# Altium PCB board.PcbDoc (part 1 of 3)
Units mil, origin at the board's own origin, x right, y up, seen from the top; angles counter-clockwise.
Board outline 6000 x 4000 mil, 2 copper layers (Top Layer, Bottom Layer); 112 components, 157 nets, 575 pads, 180 vias.
Unrouted connection lines stored in the file: 1.
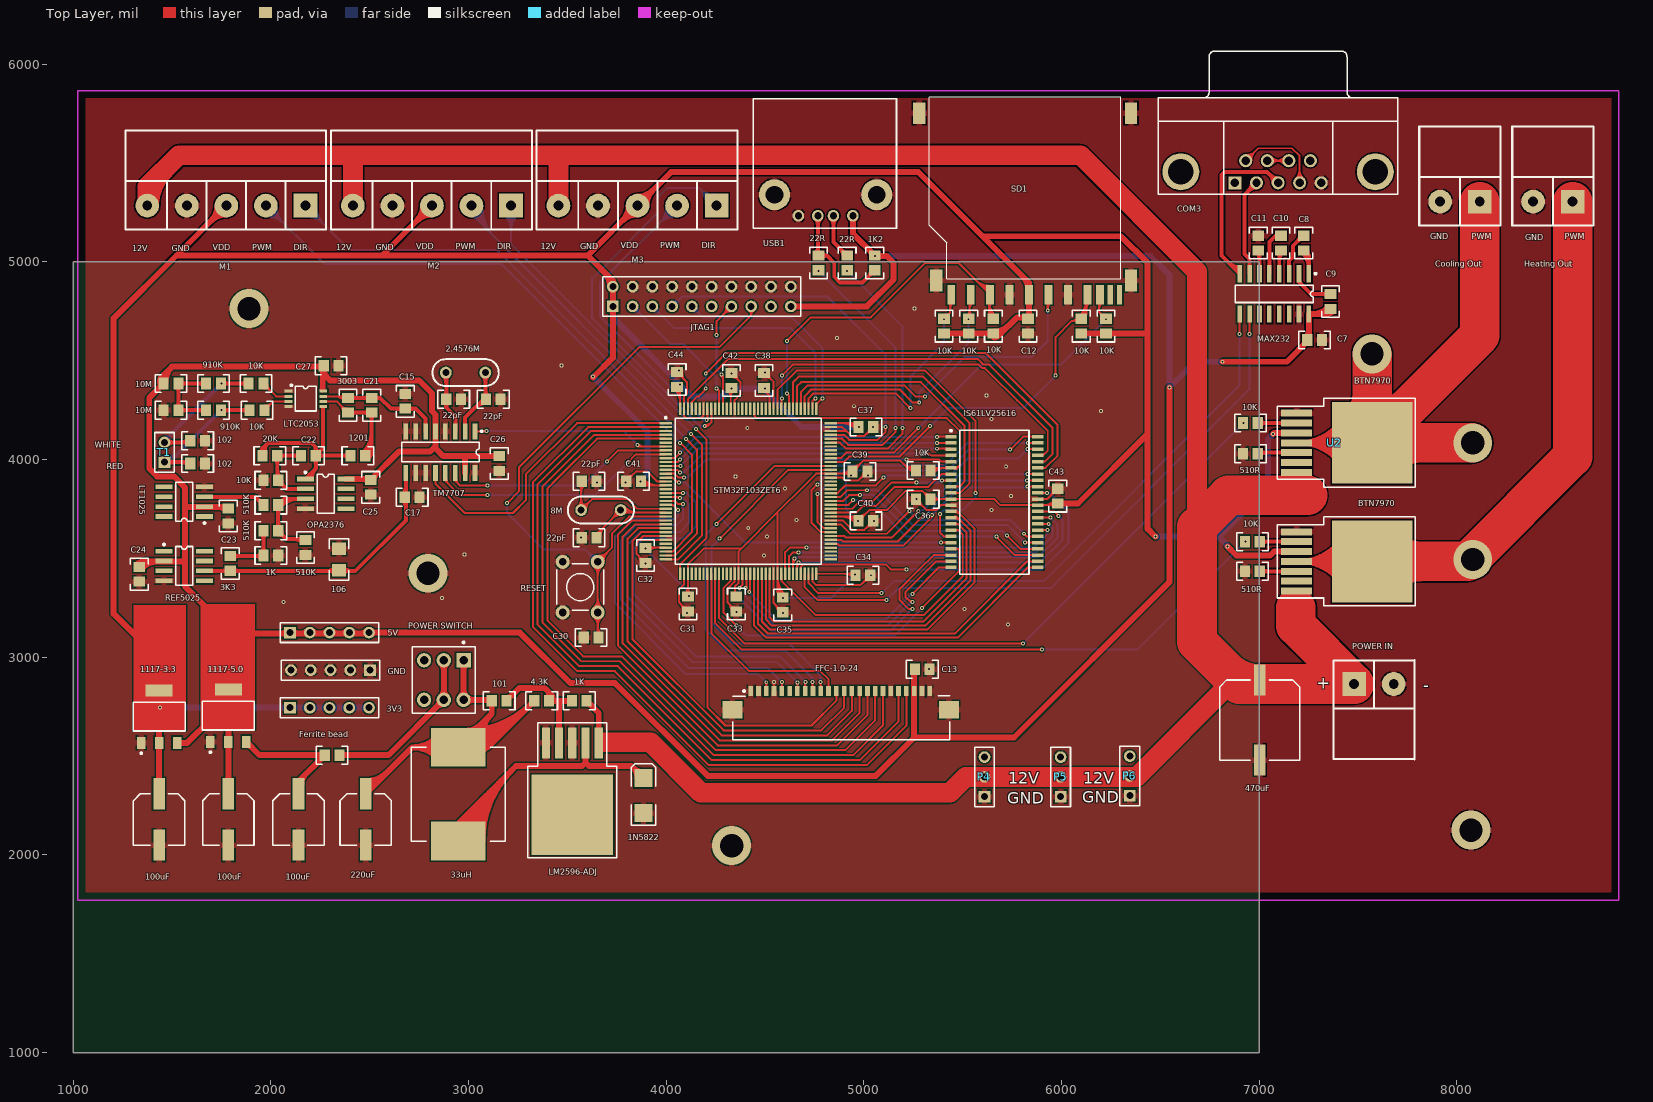
[diagram p0: Top Layer view]
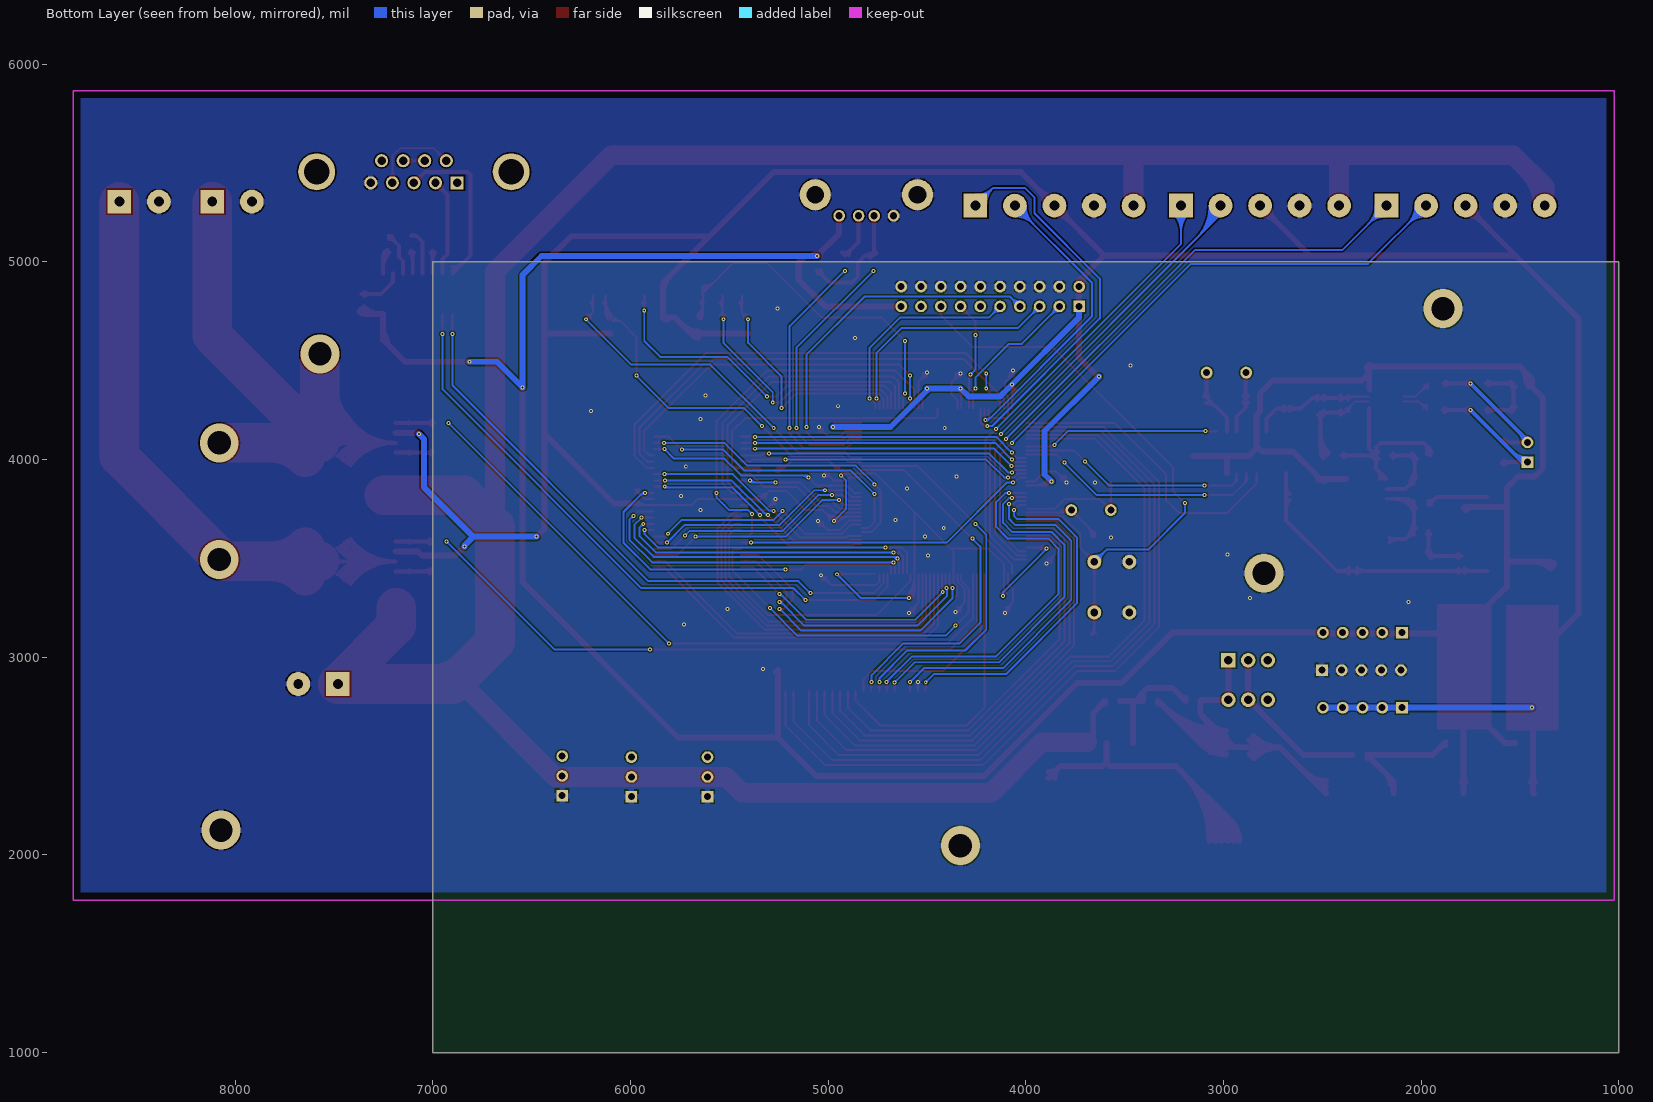
[diagram p1: Bottom Layer view, seen from below]

## Layer stack, top to bottom
Top Layer: signal copper 1.4
Dielectric: dielectric 12.6, FR-4, Dk 4.8
Bottom Layer: signal copper 1.4

## Board outline
1000,1000 7000,1000 7000,5000 1000,5000

## Design rules (kind name [scope] priority, off if disabled: settings)
Clearance [All] p1: gap=7
HoleSize [All] p1: absolutevalues=TRUE maxlimit=200 minlimit=1 maxpercent=80.000 minpercent=20.000
MinimumSolderMaskSliver [All] p1: minsoldermaskwidth=0
PlaneConnect [All] p1: planeconnectstyle=Relief reliefexpansion=20 reliefentries=4 reliefconductorwidth=30 reliefairgap=10
PolygonConnect [All] p1: connectstyle=Relief reliefconductorwidth=30 reliefentries=4 polygonreliefangle="90 Angle"
RoutingVias [All] p1: holewidth=28 width=50 viastyle="Through Hole" minholewidth=0 minwidth=0 maxholewidth=200 maxwidth=200
SilkscreenOverComponentPads [All] p1: minsilkscreentomaskgap=10
SolderMaskExpansion [All] p1: expansion=0
TestPointUsage [All] p1: valid=0 allowmultiple=FALSE
Testpoint [All] p1: side=15 testpointundercomponent=TRUE minsize=40 maxsize=100 preferedsize=60 minholesize=0 maxholesize=40 preferedholesize=32 testpointgrid=1 style=1023 order=0-112345678
Width Width_1 [InNet('GND')] p1: maxlimit=50 minlimit=10 preferedwidth=30
Width [All] p2: maxlimit=200 minlimit=10 preferedwidth=30
20 further rules are at their usual default settings.

## Classes and differential pairs
component class Designator: 1M 2.4576M 3K3 10K 10M 20K 22pF 102 106 510K 510R 910K 1201 3003 C15 C16 C17 C21 C22 C23 C24 C25 C26 C27 LT1025 LTC2053 OPA2376 Q1 Q2 Q3 R14 R15 R16 R17 R19 R20 R21 R22 R23 R24 R26 R27 REF5025 TM7707 U7 U8 Y1
component class Board: 1K 1K2 1N5822 3V3 4.3K 5V 10K 33uH 100u 100uF 101 220uF 470uF 510R 1117-3.3 1117-5.0 BTN7970 C1 C2 C3 C7 C8 C9 C10 C11 C12 C13 COM3 "Cooling Out" D1 F1 F2 "Ferrite bead" FFC-1.0-24 GND "Heating Out" L1 LM2596-ADJ M1 M2 M3 MAX232 P1 P2 P4 P5 P6 P7 P8 P9 "POWER IN" "POWER SWITCH" PwmCooling_Out R1 R2 R3 R4 R5 R6 R7 R8 R9 R10 R11 R12 S1 SD1 T1 U1 U2 U3 U4 U5 U6 USB1

## Components (designator, comment, footprint, x,y, rotation, side; value= is the part's Value field where it differs from the comment)
1K "Res" CR2012-0805 2000,3515 r180 top (schematic designator R26)
1K "Res" CR2012-0805 3560,2780 r180 top (schematic designator R1)
1K2 "Res" CR2012-0805 5055,4995 r270 top (schematic designator R7)
1N5822 "D Schottky" DSO-C2/X2.3 3885,2300 r90 top (schematic designator D1)
2.4576M "XTAL" XTAL 2885,4440 r0 top (schematic designator Y1)
3K3 "Res" CR2012-0805 1795,3475 r90 top (schematic designator R24)
3V3 "Header 5" HDR1X5 2096.89,2745 r0 top (schematic designator P8)
4.3K "Res" CR2012-0805 3370,2780 r180 top (schematic designator R2)
5V "Header 5" HDR1X5 2096.89,3125 r0 top (schematic designator P7)
8M "XTAL" XTAL 3770,3745 r180 top (schematic designator Y2)
10K "Res" CR2012-0805 2000,3895 r180 top (schematic designator R21)
10K "Res" CR2012-0805 6965,3585 r0 top (schematic designator R3)
10K "Res" CR2012-0805 6955,4185 r0 top (schematic designator R4)
10K "Res" CR2012-0805 6100,4675 r270 top (schematic designator R8)
10K "Res" CR2012-0805 6225,4675 r270 top (schematic designator R9)
10K "Res" CR2012-0805 5405,4675 r270 top (schematic designator R10)
10K "Res" CR2012-0805 5530,4675 r270 top (schematic designator R11)
10K "Res" CR2012-0805 5655,4675 r270 top (schematic designator R12)
10K "Res" CR2012-0805 1925,4385 r0 top (schematic designator R17)
10K "Res" CR2012-0805 1930,4250 r0 top (schematic designator R18)
10K "Res" CR2012-0805 5300,3945 r0 top (schematic designator R28)
10M "Res" CR2012-0805 1495,4250 r0 top (schematic designator R14)
10M "Res" CR2012-0805 1495,4385 r180 top (schematic designator R13)
20K "Res" CR2012-0805 1995,4020 r0 top (schematic designator R23)
22pF "Cap" CR2012-0805 3125,4305 r180 top (schematic designator C18)
22pF "Cap" CR2012-0805 3610,3605 r0 top (schematic designator C29)
22pF "Cap" CR2012-0805 3610,3890 r180 top (schematic designator C28)
22pF "Cap" CR2012-0805 2925,4305 r180 top (schematic designator C20)
22R "Res" CR2012-0805 4915,4995 r90 top (schematic designator R29)
22R "Res" CR2012-0805 4770,4995 r90 top (schematic designator R30)
33uH "Inductor" inductor 3185,2070 r90 top (schematic designator L1)
100uF "Cap Pol3" "CAP POL Surface Mount-6.3" 1565,2050 r90 top (schematic designator C5)
100uF "Cap Pol3" "CAP POL Surface Mount-6.3" 1915,2050 r90 top (schematic designator C4)
100uF "Cap Pol3" "CAP POL Surface Mount-6.3" 2270,2050 r90 top (schematic designator C3)
101 "Cap" CR2012-0805 3155,2780 r180 top (schematic designator C1)
102 "Cap" CR2012-0805 1630,3980 r180 top (schematic designator C16)
102 "Cap" CR2012-0805 1630,4095 r180 top (schematic designator C14)
106 "Cap" CC3216-1206 2345,3495 r270 top (schematic designator C19)
220uF "Cap Pol3" "CAP POL Surface Mount-6.3" 2610,2050 r90 top (schematic designator C6)
470uF "Cap Pol3" "CAP POL Surface MOUNT-10" 7204.72,2480.32 r90 top (schematic designator C2)
510K "Res" CR2012-0805 2175,3555 r90 top (schematic designator R27)
510K "Res" CR2012-0805 2000,3770 r0 top (schematic designator R22)
510K "Res" CR2012-0805 2000,3640 r0 top (schematic designator R25)
510R "Res" CR2012-0805 6965,3435 r0 top (schematic designator R5)
510R "Res" CR2012-0805 6955,4030 r0 top (schematic designator R6)
910K "Res" CR2012-0805 1710,4250 r180 top (schematic designator R16)
910K "Res" CR2012-0805 1710,4385 r180 top (schematic designator R15)
1117-3.3 "REG1117-3.3" ZZ311 1435,2700 r0 top (schematic designator U5)
1117-5.0 "REG1117-5" ZZ311 1785,2705 r0 top (schematic designator U4)
1201 "Res" CR2012-0805 2440,4020 r0 top (schematic designator R19)
3003 "Res" CR2012-0805 2390,4275 r90 top (schematic designator R20)
BTN7970 "BTN7970" TS7B 7405,3485 r270 top (schematic designator U1)
C7 "Cap" CR2012-0805 7280,4605 r180 top
C8 "Cap" CR2012-0805 7225,5095 r90 top
C9 "Cap" CR2012-0805 7360,4800 r90 top
C10 "Cap" CR2012-0805 7110,5095 r90 top
C11 "Cap" CR2012-0805 6995,5095 r270 top
C12 "Cap" CR2012-0805 5830,4675 r90 top
C13 "Cap" CR2012-0805 5295,2940 r180 top
C15 "Cap" CR2012-0805 2680,4295 r90 top
C17 "Cap" CR2012-0805 2715,3810 r180 top
C21 "Cap" CR2012-0805 2510,4275 r270 top
C22 "Cap" CR2012-0805 2190,4020 r180 top
C23 "Cap" CR2012-0805 1785,3715 r90 top
C24 "Cap" CR2012-0805 1335,3420 r90 top
C25 "Cap" CR2012-0805 2505,3860 r90 top
C26 "Cap" CR2012-0805 3155,3980 r90 top
C27 "Cap" CR2012-0805 2305,4475 r180 top
C30 "Cap" CR2012-0805 3620,3100 r0 top
C31 "Cap" CR2012-0805 4110,3270 r90 top
C32 "Cap" CR2012-0805 3895,3515 r90 top
C33 "Cap" CR2012-0805 4355,3270 r90 top
C34 "Cap" CR2012-0805 4995,3415 r180 top
C35 "Cap" CR2012-0805 4590,3265 r90 top
C36 "Cap" CR2012-0805 5300,3800 r0 top
C37 "Cap" CR2012-0805 5010,4165 r180 top
C38 "Cap" CR2012-0805 4495,4400 r270 top
C39 "Cap" CR2012-0805 4980,3940 r180 top
C40 "Cap" CR2012-0805 5010,3690 r180 top
C41 "Cap" CR2012-0805 3835,3890 r0 top
C42 "Cap" CR2012-0805 4330,4400 r270 top
C43 "Cap" CR2012-0805 5980,3815 r270 top
C44 "Cap" CR2012-0805 4055,4405 r270 top
COM3 "D Connector 9" DSUB1.385-2H9 7095,5830 r0 top (schematic designator J1)
"Cooling Out" "ConnP_2" Conn_2-5.08 8015,5305 r180 top (schematic designator P2)
"Ferrite bead" "FB" CR2012-0805 2310,2505 r180 top (schematic designator F1)
FFC-1.0-24 "FFC_1.0_24" FFC/SM1.0-2H24 4890,2765 r0 top (schematic designator F2)
GND "Header 5" HDR1X5 2501.89,2935 r180 top (schematic designator P9)
"Heating Out" "ConnP_2" Conn_2-5.08 8485,5305 r180 top (schematic designator P1)
IS61LV25616 "IS61LV25616" SO-G44/P.8 5660,3785 r270 top (schematic designator U9)
JTAG1 "" HDR2X10_CEN 3730,4775 r0 top
LM2596-ADJ "LM2596S-ADJ" TS5B 3525,2370 r180 top (schematic designator U3)
LT1025 "LT1025" SO-G8 1562,3787 r90 top (schematic designator Q1)
LTC2053 "LTC2053" MSOP-8 2089,4346 r270 top (schematic designator Q2)
M1 "ConnP_5" Conn_5-5.08 2075,5285 r180 top
M2 "ConnP_5" Conn_5-5.08 3115,5285 r180 top
M3 "ConnP_5" Conn_5-5.08 4155,5285 r180 top
MAX232 "MAX232CSE" NSO16 7076,4838 r180 top (schematic designator U6)
OPA2376 "OPA2376" SO-G8 2277,3827 r270 top (schematic designator Q3)
P4 "Header 3" HDR1X3 5610,2295 r90 top
P5 "Header 3" HDR1X3 5995,2295 r90 top
P6 "Header 3" HDR1X3 6345,2300 r90 top
"POWER IN" "ConnP_2" Conn_2-5.08 7580,2865 r0 top (schematic designator P3)
"POWER SWITCH" "SW-DPDT" DPDT-6 2875,2885 r270 top (schematic designator S1)
REF5025 "REF5025" SO-G8 1562,3462 r270 top (schematic designator U8)
RESET "SW-PB" SW-PB-6.5x4.5 3565,3355 r270 top (schematic designator K1)
SD1 "SDCard" SDCARD 5540,4835 r90 top
STM32F103ZET6 "STM32" F-QFP20x20-G144/N 4415,3840 r0 top (schematic designator M4)
T1 "Header 2" HDR1X2 1462,3987 r90 top
TM7707 "TM7707" SO-G16/D10 2858,4038 r180 top (schematic designator U7)
U2 "BTN7970" TS7B 7405,4085 r270 top
USB1 "USB TypeA" USB_A 5065,5340 r180 top

## Footprints (in the part's own frame and the unit in brackets; to place one, negate y for a bottom-side part, rotate by r counter-clockwise, add the part's x,y. Pads: shape width x height; smd on the part's side, far side on the other; paste and mask are expansions set on the pad)
"CAP POL Surface Mount-6.3" [mm]
  rect 4x1.5 smd: 1(6.604,3.302) 2(0,3.302)
  silkscreen extent 0,0 6.6,6.6
"CAP POL Surface MOUNT-10" [mm]
  rect 4x1.5 smd: 1(10.287,5.144) 2(0,5.143)
  silkscreen extent 0,0 10.29,10.29
CC3216-1206 [mm] "Chip Capacitor; Body 3.2 x 1.6 mm (LxW typ)"
  rect 1.6x1.8 smd: 1(-1.4,0) 2(1.4,0)
  silkscreen extent -2.67,-1.27 2.67,1.27
Conn_2-5.08 [mil]
  rect 120x120 hole 50: 1(-100,0)
  round 120 hole 50: 2(100,0)
  silkscreen extent -205,-380 205,120
Conn_5-5.08 [mil]
  rect 120x120 hole 50: 1(-100,0)
  round 120 hole 50: 2(100,0) 3(300,0) 4(500,0) 5(700,0)
  silkscreen extent -205,-380 810,120
CR2012-0805 [mm] "Chip Resistor; Body 2.0 x 1.3 mm (LxW typ)"
  rect 1.3x1.5 smd: 1(-0.95,0) 2(0.95,0)
  silkscreen extent -2.03,-1.14 2.03,1.14
DPDT-6 [mm] "Double-Pole, Double-Throw Switch; 6 Leads"
  rect 1.85x1.85 hole 1.1: 1(-2.54,2.54)
  round 1.85 hole 1.1: 2(-2.54,0) 3(-2.54,-2.54) 4(2.54,-2.54) 5(2.54,0) 6(2.54,2.54)
  silkscreen extent -4.96,-4.06 4.28,4.06
DSO-C2/X2.3 [mm] "DO-214-AA/SMB; 2 C-Bend Leads; Body 5.3 x 3.6 mm, inc. leads (LxW)"
  rect 2.3x2.3 smd: 1(-2.25,0) 2(2.25,0)
  silkscreen extent -3.8,-1.55 4.1,1.55
DSUB1.385-2H9 [mm] "Connector; D Subminiature; 9 Position; Right Angle; Pitch 1.385 mm"
  rect 1.69x1.69 hole 1.09: 1(-5.54,-10.92)
  round 1.69 hole 1.09: 2(-2.77,-10.92) 3(0,-10.92) 4(2.77,-10.92) 5(5.54,-10.92) 6(-4.155,-8.08) 7(-1.385,-8.08) 8(1.385,-8.08) 9(4.155,-8.08)
  round 4.76 hole 3.26: 10(-12.495,-9.5) 11(12.495,-9.5)
  silkscreen extent -15.4,-12.4 15.4,6
F-QFP20x20-G144/N [mm] "QFP; 144 Leads; Body 20 x 20 mm; Pitch 0.5 mm"
  rect 1.6x0.3 smd: 1(-10.6,8.75) 2(-10.6,8.25) 3(-10.6,7.75) 4(-10.6,7.25) 5(-10.6,6.75) 6(-10.6,6.25) 7(-10.6,5.75) 8(-10.6,5.25) 9(-10.6,4.75) 10(-10.6,4.25) 11(-10.6,3.75) 12(-10.6,3.25) 13(-10.6,2.75) 14(-10.6,2.25) 15(-10.6,1.75) 16(-10.6,1.25) 17(-10.6,0.75) 18(-10.6,0.25) 19(-10.6,-0.25) 20(-10.6,-0.75) 21(-10.6,-1.25) 22(-10.6,-1.75) 23(-10.6,-2.25) 24(-10.6,-2.75) 25(-10.6,-3.25) 26(-10.6,-3.75) 27(-10.6,-4.25) 28(-10.6,-4.75) 29(-10.6,-5.25) 30(-10.6,-5.75) 31(-10.6,-6.25) 32(-10.6,-6.75) 33(-10.6,-7.25) 34(-10.6,-7.75) 35(-10.6,-8.25) 36(-10.6,-8.75) 73(10.6,-8.75) 74(10.6,-8.25) 75(10.6,-7.75) 76(10.6,-7.25) 77(10.6,-6.75) 78(10.6,-6.25) 79(10.6,-5.75) 80(10.6,-5.25) 81(10.6,-4.75) 82(10.6,-4.25) 83(10.6,-3.75) 84(10.6,-3.25) 85(10.6,-2.75) 86(10.6,-2.25) 87(10.6,-1.75) 88(10.6,-1.25) 89(10.6,-0.75) 90(10.6,-0.25) 91(10.6,0.25) 92(10.6,0.75) 93(10.6,1.25) 94(10.6,1.75) 95(10.6,2.25) 96(10.6,2.75) 97(10.6,3.25) 98(10.6,3.75) 99(10.6,4.25) 100(10.6,4.75) 101(10.6,5.25) 102(10.6,5.75) 103(10.6,6.25) 104(10.6,6.75) 105(10.6,7.25) 106(10.6,7.75) 107(10.6,8.25) 108(10.6,8.75)
  rect 0.3x1.6 smd: 37(-8.75,-10.6) 38(-8.25,-10.6) 39(-7.75,-10.6) 40(-7.25,-10.6) 41(-6.75,-10.6) 42(-6.25,-10.6) 43(-5.75,-10.6) 44(-5.25,-10.6) 45(-4.75,-10.6) 46(-4.25,-10.6) 47(-3.75,-10.6) 48(-3.25,-10.6) 49(-2.75,-10.6) 50(-2.25,-10.6) 51(-1.75,-10.6) 52(-1.25,-10.6) 53(-0.75,-10.6) 54(-0.25,-10.6) 55(0.25,-10.6) 56(0.75,-10.6) 57(1.25,-10.6) 58(1.75,-10.6) 59(2.25,-10.6) 60(2.75,-10.6) 61(3.25,-10.6) 62(3.75,-10.6) 63(4.25,-10.6) 64(4.75,-10.6) 65(5.25,-10.6) 66(5.75,-10.6) 67(6.25,-10.6) 68(6.75,-10.6) 69(7.25,-10.6) 70(7.75,-10.6) 71(8.25,-10.6) 72(8.75,-10.6) 109(8.75,10.6) 110(8.25,10.6) 111(7.75,10.6) 112(7.25,10.6) 113(6.75,10.6) 114(6.25,10.6) 115(5.75,10.6) 116(5.25,10.6) 117(4.75,10.6) 118(4.25,10.6) 119(3.75,10.6) 120(3.25,10.6) 121(2.75,10.6) 122(2.25,10.6) 123(1.75,10.6) 124(1.25,10.6) 125(0.75,10.6) 126(0.25,10.6) 127(-0.25,10.6) 128(-0.75,10.6) 129(-1.25,10.6) 130(-1.75,10.6) 131(-2.25,10.6) 132(-2.75,10.6) 133(-3.25,10.6) 134(-3.75,10.6) 135(-4.25,10.6) 136(-4.75,10.6) 137(-5.25,10.6) 138(-5.75,10.6) 139(-6.25,10.6) 140(-6.75,10.6) 141(-7.25,10.6) 142(-7.75,10.6) 143(-8.25,10.6) 144(-8.75,10.6)
  silkscreen extent -10.72,-9.4 9.4,9.57
FFC/SM1.0-2H24 [mm] "Connector; FH12 Series; 24 Position; 1.0mm Spaced Bottom Eccentric Contact"
  rect 0.6x1.3 smd: 1(-11.75,1.625) 2(-10.75,1.625) 3(-9.75,1.625) 4(-8.75,1.625) 5(-7.75,1.625) 6(-6.75,1.625) 7(-5.75,1.625) 8(-4.75,1.625) 9(-3.75,1.625) 10(-2.75,1.625) 11(-1.75,1.625) 12(-0.75,1.625) 13(0.25,1.625) 14(1.25,1.625) 15(2.25,1.625) 16(3.25,1.625) 17(4.25,1.625) 18(5.25,1.625) 19(6.25,1.625) 20(7.25,1.625) 21(8.25,1.625) 22(9.25,1.625) 23(10.25,1.625) 24(11.25,1.625)
  rect 2.54x2.2 smd: 25(13.716,-0.762) 26(-14.097,-0.762)
  silkscreen extent -14.05,-4.62 13.84,1.75
HDR1X2 [mm] "Connector; Header; 2 Position"
  rect 1.5x1.5 hole 0.9: 1(0,0)
  round 1.5 hole 0.9: 2(2.54,0)
  silkscreen extent -1.27,-1.27 3.81,1.27
HDR1X3 [mm] "Connector; Header; 3 Position"
  rect 1.5x1.5 hole 0.9: 1(0,0)
  round 1.5 hole 0.9: 2(2.54,0) 3(5.08,0)
  silkscreen extent -1.27,-1.27 6.35,1.27
HDR1X5 [mm] "Connector; Header; 5 Position"
  rect 1.5x1.5 hole 0.9: 1(0,0)
  round 1.5 hole 0.9: 2(2.54,0) 3(5.08,0) 4(7.62,0) 5(10.16,0)
  silkscreen extent -1.27,-1.27 11.43,1.27
HDR2X10_CEN [mm] "Connector; Header; 10x2 Position"
  rect 1.5x1.5 hole 0.9: 1(0,0)
  round 1.5 hole 0.9: 2(2.54,0) 3(5.08,0) 4(7.62,0) 5(10.16,0) 6(12.7,0) 7(15.24,0) 8(17.78,0) 9(20.32,0) 10(22.86,0) 11(0,2.54) 12(2.54,2.54) 13(5.08,2.54) 14(7.62,2.54) 15(10.16,2.54) 16(12.7,2.54) 17(15.24,2.54) 18(17.78,2.54) 19(20.32,2.54) 20(22.86,2.54)
  silkscreen extent -1.27,-1.27 24.13,3.81
inductor [mm]
  rect 5x7 smd: 1(0,6.032) 2(12.065,6.033)
  silkscreen extent 0,0 12.06,12.07
MSOP-8 [mil] "Shrink Small Outline; 8 Leads; Body Width 3 mm; Pitch 0.65 mm"
  rect 15x40 smd: 1(0,0) 2(25.6,0) 3(51.2,0) 4(76.8,0) 5(76.8,176) 6(51.2,176) 7(25.6,176) 8(0,176)
  silkscreen extent -35,10 100,140
NSO16 [mm] "Small Outline; 16 Leads; Body Width 3.9 mm; Pitch 1.27 mm"
  rect 0.6x2.2 smd: 1(-4.445,-2.6) 2(-3.175,-2.6) 3(-1.905,-2.6) 4(-0.635,-2.6) 5(0.635,-2.6) 6(1.905,-2.6) 7(3.175,-2.6) 8(4.445,-2.6) 9(4.445,2.6) 10(3.175,2.6) 11(1.905,2.6) 12(0.635,2.6) 13(-0.635,2.6) 14(-1.905,2.6) 15(-3.175,2.6) 16(-4.445,2.6)
  silkscreen extent -5.42,-2.72 5,1.1
SDCARD [mm]
  rect 2.8x1.6 smd: 0(1.8,4.4) 0(1.8,-20.6) 0(23.3,-20.6) 0(23.3,6.6)
  rect 2.5x1 smd: 1(0,0) 2(0,-2.5) 3(0,-5) 4(0,-7.5) 5(0,-10) 6(0,-12.5) 7(0,-15) 8(0,-16.625) 9(0,2.5)
  rect 2.5x0.7 smd: 10(0,-17.925) 11(0,-19.125)
  silkscreen extent 2.03,-19.3 25.4,5.33
SO-G8 [mm] "Small Outline; 8 Leads; Body Width 3.9 mm; Pitch 1.27 mm"
  rect 0.6x2.2 smd: 1(-1.905,-2.6) 2(-0.635,-2.6) 3(0.635,-2.6) 4(1.905,-2.6) 5(1.905,2.6) 6(0.635,2.6) 7(-0.635,2.6) 8(-1.905,2.6)
  silkscreen extent -2.88,-2.72 2.5,1.1
SO-G16/D10 [mm] "Small Outline; 16 Leads; Body Width 3.9 mm; Pitch 1.27 mm"
  rect 0.6x2.05 smd: 1(-4.445,-2.675) 2(-3.175,-2.675) 3(-1.905,-2.675) 4(-0.635,-2.675) 5(0.635,-2.675) 6(1.905,-2.675) 7(3.175,-2.675) 8(4.445,-2.675) 9(4.445,2.675) 10(3.175,2.675) 11(1.905,2.675) 12(0.635,2.675) 13(-0.635,2.675) 14(-1.905,2.675) 15(-3.175,2.675) 16(-4.445,2.675)
  silkscreen extent -5.42,-2.8 5,1.25
SO-G44/P.8 [mm] "Small Outline; 44 Leads; Body Width 10.16 mm; Pitch 0.8 mm"
  rect 0.45x1.45 smd: 1(-8.4,-5.575) 2(-7.6,-5.575) 3(-6.8,-5.575) 4(-6,-5.575) 5(-5.2,-5.575) 6(-4.4,-5.575) 7(-3.6,-5.575) 8(-2.8,-5.575) 9(-2,-5.575) 10(-1.2,-5.575) 11(-0.4,-5.575) 12(0.4,-5.575) 13(1.2,-5.575) 14(2,-5.575) 15(2.8,-5.575) 16(3.6,-5.575) 17(4.4,-5.575) 18(5.2,-5.575) 19(6,-5.575) 20(6.8,-5.575) 21(7.6,-5.575) 22(8.4,-5.575) 23(8.4,5.575) 24(7.6,5.575) 25(6.8,5.575) 26(6,5.575) 27(5.2,5.575) 28(4.4,5.575) 29(3.6,5.575) 30(2.8,5.575) 31(2,5.575) 32(1.2,5.575) 33(0.4,5.575) 34(-0.4,5.575) 35(-1.2,5.575) 36(-2,5.575) 37(-2.8,5.575) 38(-3.6,5.575) 39(-4.4,5.575) 40(-5.2,5.575) 41(-6,5.575) 42(-6.8,5.575) 43(-7.6,5.575) 44(-8.4,5.575)
  silkscreen extent -9.3,-5.7 9.25,4.45
SW-PB-6.5x4.5 [mm]
  round 1.8 hole 1: 1(-3.25,-2.25) 1(3.25,-2.25) 2(-3.25,2.25) 2(3.25,2.25)
  silkscreen extent -3,-3 3,3
TS5B [mm] "D2-PAK; 5 Leads; Body 14.4 (inc. leads) x 10.4 mm (LxW max)"
  rect 1.05x4 smd: 1(-3.4,-5) 2(-1.7,-5) 3(0,-5) 4(1.7,-5) 5(3.4,-5)
  rect 10.5x10.3 smd: 6(0,4.225)
  silkscreen extent -5.72,-7.62 5.71,9.78
TS7B [mm] "D2-PAK; 7 Leads; Body 14.4 (inc. leads) x 10.4 mm (LxW max)"
  rect 0.9x4 smd: 1(-3.81,-5.5) 2(-2.54,-5.5) 3(-1.27,-5.5) 4(0,-5.5) 5(1.27,-5.5) 6(2.54,-5.5) 7(3.81,-5.5)
  rect 10.5x10.3 smd: 8(0,4.225)
  silkscreen extent -5.72,-8 5.72,9.78
USB_A [mm]
  round 1.5 hole 0.92: 1(3.07,2.71) 2(5.57,2.71) 3(7.57,2.71) 4(10.07,2.71)
  round 4 hole 2.3: 5(0,0) 5(13.14,0)
  silkscreen extent -2.54,-12.32 15.88,4.32
XTAL [mil]
  round 60 hole 35.43: 1(0,0) 2(200,0)
  silkscreen extent -68,-68 268,68
ZZ311 [mm] "SOT-223/SC-73; 4 Leads; Body 6.7 x 7.3 mm, inc. leads (LxW max)"
  rect 1.1x1.55 smd: 1(-2.3,-3.375) 2(0,-3.375) 3(2.3,-3.375)
  rect 3.45x1.55 smd: 4(0,3.375)
  silkscreen extent -3.35,-4.82 3.35,1.85

## Part data
1K 1K 1K2 3K3 4.3K 10K 10K 10K 10K 10K 10K 10K 10K 10K 10K 10K 10M 10M 20K 22R 22R 510K 510K 510K 510R 510R 910K 910K 1201 3003: "Resistor"
1N5822: "Schottky Diode"
2.4576M 8M: "Crystal Oscillator"
3V3 5V GND: "Header, 5-Pin"
22pF 22pF 22pF 22pF 101 102 102 106 C7 C8 C9 C10 C11 C12 C13 C15 C17 C21 C22 C23 C24 C25 C26 C27 C30 C31 C32 C33 C34 C35 C36 C37 C38 C39 C40 C41 C42 C43 C44: "Capacitor"
100uF 100uF 100uF 220uF 470uF: "Polarized Capacitor (Surface Mount)"
1117-3.3 1117-5.0: "800mA and 1A Low Dropout Positive Regulator 2.85V, 3.3V, 5V, and Adjustable"
COM3: "Receptacle Assembly, 9 Position, Right Angle"
FFC-1.0-24: library part FFC/SM1.0-2H24
IS61LV25616: "64K*16 SRAM"
JTAG1: library part "Header 10X2A", "Header, 10-Pin, Dual row"
LM2596-ADJ: "Simple Switcher Power Converter 150 kHz 3A Step Down Voltage Regulator"
MAX232: "+5V Powered, Multi-Channel RS-232 Driver/Receiver"
OPA2376: library part Double_AMP
P4 P5 P6: "Header, 3-Pin"
"POWER SWITCH": "Double-Pole, Double-Throw Switch"
RESET: "Switch"
STM32F103ZET6: library part STM32_104
T1: "Header, 2-Pin"
USB1: library part USB_A

## Via types
v1: diameter 20, hole 10, Top Layer to Bottom Layer, 173 vias
v2: diameter 196.85, hole 118.11, Top Layer to Bottom Layer, 7 vias

## Nets (pads, with @x,y where several pads share a name; then routed paths per layer and width w, separated by ;. In a path a pad name is that pad's centre, name@x,y a point inside that pad or via, vN(x,y) a via of type N, cw(c..) or ccw(c..) an arc to the next point about the centre after c; other vN are vias at no path point)
7V5: 100uF.1@2140,2310 1117-5.0.3 "Ferrite bead.2" | length 784.3
  Top Layer w30: 1117-5.0.3@1875.55,2556.61 cw(c1875.55,2519.16) 1902.03,2545.65 ; 1117-5.0.3@1875.55,2572.13 1942.68,2505 2272.6,2505 2140,2372.4 100uF.1@2140,2310 ; 100uF.1@2154.53,2359.21 cw(c2221.44,2359.21) 2174.13,2406.53 ; 2247.8,2480.2 cw(c2272.6,2455.4) 2272.6,2490.47
12V: 1K.1@3597.4,2780 470uF.1 "POWER IN.1" BTN7970.7 LM2596-ADJ.1 M1.5 M2.5 M3.5 P4.2 P5.2 P6.2 U2.7 | length 14297.6
  Top Layer w30: 1K.1@3597.4,2765.47 cw(c3597.4,2730.4) 1K.1@3622.2,2755.2 ; 1K.1@3597.4,2780 3658.86,2718.54 LM2596-ADJ.1@3658.86,2566.85
  Top Layer w100: M1.5@1375,5285 1375,5380 1535,5540 2430,5540 ; M1.5@1385,5285 cw(c1638.49,5285) 1459.25,5464.25 ; M2.5@2415,5285 2415,5525 2430,5540 ; M3.5@3455,5285 3455,5535 3450,5540 ; 3690,2570 3920,2570 4175,2315 5435,2315 5515,2395 5665,2395 5980,2395 P5.2@5995,2395 6380,2395 6850,2865 6898.78,2865 ; 6685,3660 6685,4950 6095,5540 3450,5540 ; 2430,5540 3450,5540
  Top Layer w200: 6827.25,2936.53 ccw(c7002.22,3111.51) 470uF.1@7002.22,2864.06 ; 7185,3160 7480,2865 7002.22,2865 6898.78,2865 6685,3078.78 6685,3660 6843.9,3818.9 7244.09,3818.9 ; 7185,3185 7185,3250
DRDY: STM32F103ZET6.1 TM7707.12 | length 1571.5
  Top Layer w10: TM7707.12@2828.18,3899.33 cw(c2816.56,3887.7) 2833,3887.7 cw(c2849.44,3887.7) TM7707.12@2837.82,3899.33 ; TM7707.12@2833,3932.69 2833,3877 2980,3730 3225,3730 3290,3795 3290,3925 3549.49,4184.49 STM32F103ZET6.1@3997.68,4184.49
GND: 1K.1@2037.4,3515 1N5822.1 10K.2@1962.6,3895 10M.1@1457.6,4250 22pF.1 100uF.2 102.1 106.1 220uF.2 470uF.2 510K.1@2175,3517.6 510R.1 1117-3.3.1 1117-5.0.1 "Cooling Out.2" "Heating Out.2" "POWER IN.2" BTN7970.1 C7.1 C11.1 C12.1 C13.1 C15.2 C17.1 C23.1 C24.1 C25.1 C26.1 C27.1 C30.1 C31.1 C32.1 C33.1 C34.1 C35.1 C36.1 C37.1 C38.1 C39.1 C40.1 C41.1 C42.1 C43.1 C44.1 COM3.5 FFC-1.0-24.1 FFC-1.0-24.2 FFC-1.0-24.4 FFC-1.0-24.19 FFC-1.0-24.23 FFC-1.0-24.24 FFC-1.0-24.25 FFC-1.0-24.26 GND.1 GND.2 GND.3 GND.4 GND.5 IS61LV25616.12 IS61LV25616.34 JTAG1.12 JTAG1.13 JTAG1.14 JTAG1.15 JTAG1.16 JTAG1.17 JTAG1.18 JTAG1.19 JTAG1.20 LM2596-ADJ.3 LM2596-ADJ.5 LT1025.4 LTC2053.1 LTC2053.4 M1.4 M2.4 M3.4 MAX232.15 OPA2376.4 P4.1 P5.1 P6.1 REF5025.4 RESET.1 SD1.0 SD1.3 SD1.6 STM32F103ZET6.16 STM32F103ZET6.30 STM32F103ZET6.31 STM32F103ZET6.38 STM32F103ZET6.51 STM32F103ZET6.61 STM32F103ZET6.71 STM32F103ZET6.83 STM32F103ZET6.94 STM32F103ZET6.106 STM32F103ZET6.107 STM32F103ZET6.120 STM32F103ZET6.130 STM32F103ZET6.138 STM32F103ZET6.143 TM7707.4 TM7707.7 TM7707.8 TM7707.10 TM7707.11 TM7707.16 U2.1 USB1.4 USB1.5 | length 5441.6
  Top Layer w10: C41.1@3797.6,3890 3847.6,3940 3905,3940 3955.79,3889.21 STM32F103ZET6.16@3997.68,3889.21 ; C41.1@3797.6,3904.53 ccw(c3797.6,3939.6) C41.1@3822.4,3914.8 ; C41.1@3797.6,3914.53 ccw(c3797.6,3973.74) 3839.47,3931.87 ; C41.1@3800,3885 cw(c3817.87,3885) C41.1@3805.23,3897.64 ; C41.1@3818.19,3893.94 cw(c3858.39,3893.94) 3829.96,3922.37 ; 3853.13,3519.47 cw(c3811.26,3477.6) C32.1@3870.47,3477.6 ; 3862.63,3509.96 ccw(c3891.06,3538.39) C32.1@3891.06,3498.19 ; C32.1@3870.2,3502.4 cw(c3845.4,3477.6) C32.1@3880.47,3477.6 ; C32.1@3884.63,3487.97 cw(c3871.66,3475) C32.1@3890,3475 ; C32.1@3895,3477.6 3850,3522.6 3850,3580 3863.94,3593.94 ; STM32F103ZET6.31@3997.68,3593.94 3863.94,3593.94 ; STM32F103ZET6.30@3997.68,3613.62 3883.62,3613.62 3863.94,3593.94 ; C44.1@4055,4442.4 4105,4392.4 4105,4335 4090.2,4320.2 STM32F103ZET6.143@4090.2,4257.32 4090.2,4219.8 4100,4210 4175.99,4210 4188.62,4222.63 STM32F103ZET6.138@4188.62,4257.32 ; C44.1@4058.94,4421.81 cw(c4058.94,4381.61) 4087.37,4410.04 ; C44.1@4060,4450 ccw(c4090.41,4450) C44.1@4068.91,4428.49 ; 4068.13,3274.47 cw(c4026.26,3232.6) C31.1@4085.47,3232.6 ; C44.1@4069.53,4442.4 ccw(c4104.6,4442.4) C44.1@4079.8,4417.6 ; C44.1@4070,4450 ccw(c4124.56,4450) 4085.98,4411.42 ; 4077.63,3264.96 ccw(c4106.06,3293.39) C31.1@4106.06,3253.19 ; C44.1@4079.53,4442.4 ccw(c4138.74,4442.4) 4096.87,4400.53 ; C31.1@4085.2,3257.4 cw(c4060.4,3232.6) C31.1@4095.47,3232.6 ; C31.1@4087.56,3255.04 cw(c4057.51,3225) C31.1@4100,3225 ; STM32F103ZET6.38@4090.2,3422.68 4090.2,3370.2 4065,3345 4065,3277.6 C31.1@4110,3232.6 ; C31.1@4104.63,3237.97 cw(c4091.66,3225) C31.1@4110,3225 ; 4313.13,3274.47 cw(c4271.26,3232.6) C33.1@4330.47,3232.6 ; 4322.63,3264.96 ccw(c4351.06,3293.39) C33.1@4351.06,3253.19 ; C42.1@4330,4430 cw(c4330,4412.13) C42.1@4342.64,4424.77 ; C42.1@4330,4437.4 4375,4392.4 4375,4330 4346.1,4301.1 STM32F103ZET6.130@4346.1,4257.32 ; C33.1@4330.2,3257.4 cw(c4305.4,3232.6) C33.1@4340.47,3232.6 ; C42.1@4333.94,4416.81 cw(c4333.94,4376.61) 4362.37,4405.04 ; 4344.32,3381.86 4310,3347.53 4310,3277.6 C33.1@4355,3232.6 ; C42.1@4344.53,4437.4 ccw(c4379.6,4437.4) C42.1@4354.8,4412.6 ; C33.1@4344.63,3242.97 cw(c4331.66,3230) C33.1@4350,3230 ; 4346.1,3383.63 STM32F103ZET6.51@4346.1,3422.68 ; C42.1@4354.53,4437.4 ccw(c4413.74,4437.4) 4371.87,4395.53 ; C38.1@4498.94,4416.81 cw(c4498.94,4364.54) 4535.9,4401.5 ; C38.1@4498.94,4426.81 cw(c4498.94,4398.68) C38.1@4518.83,4418.57 ; C38.1@4500,4437.4 4542.95,4394.45 STM32F103ZET6.120@4542.95,4257.32 ; C38.1@4505,4440 ccw(c4523.34,4440) C38.1@4510.37,4427.03 ; C38.1@4519.53,4437.4 ccw(c4566.67,4437.4) 4533.34,4404.07 ; FFC-1.0-24.4@4540.7,2847.57 ccw(c4530.3,2857.96) 4545,2857.96 ; v1@4541.46,2871.46 cw(c4532.93,2862.93) 4545,2862.93 cw(c4557.07,2862.93) v1@4548.54,2871.46 ; STM32F103ZET6.61@4542.95,3422.68 4542.95,3274.65 C35.1@4585,3232.6 ; 4545,2860.43 ccw(c4563.19,2860.43) FFC-1.0-24.4@4550.33,2847.57 ; v1(4545,2875) 4545,2829.49 FFC-1.0-24.4@4545.51,2828.98 ; 4548.13,3269.47 cw(c4506.26,3227.6) C35.1@4565.47,3227.6 ; 4557.63,3259.96 ccw(c4586.06,3288.39) C35.1@4586.06,3248.19 ; C35.1@4565.2,3252.4 cw(c4540.4,3227.6) C35.1@4575.47,3227.6 ; C35.1@4579.63,3237.97 cw(c4566.66,3225) C35.1@4585,3225 ; STM32F103ZET6.71@4739.8,3422.68 4739.8,3385.2 4760,3365 4982.4,3365 C34.1@5032.4,3415 ; STM32F103ZET6.83@4832.32,3692.36 4892.64,3692.36 4940,3645 5002.4,3645 C40.1@5047.4,3690 ; STM32F103ZET6.94@4832.32,3908.9 4891.1,3908.9 4905,3895 4972.4,3895 C39.1@5017.4,3940 ; STM32F103ZET6.106@4832.32,4145.12 4909.88,4145.12 ; STM32F103ZET6.107@4832.32,4164.8 4890.2,4164.8 4909.88,4145.12 ; 4975.53,3898.13 cw(c5017.4,3856.26) C39.1@5017.4,3915.47 ; 4985.04,3907.63 ccw(c4956.61,3936.06) C39.1@4996.81,3936.06 ; 4990.53,3373.13 cw(c5032.4,3331.26) C34.1@5032.4,3390.47 ; C39.1@4992.6,3915.2 cw(c5017.4,3890.4) C39.1@5017.4,3925.47 ; 5000.04,3382.63 ccw(c4971.61,3411.06) C34.1@5011.81,3411.06 ; 5005.53,3648.13 cw(c5047.4,3606.26) C40.1@5047.4,3665.47 ; 5005.53,4123.13 cw(c5047.4,4081.26) C37.1@5047.4,4140.47 ; C34.1@5007.6,3390.2 cw(c5032.4,3365.4) C34.1@5032.4,3400.47 ; 5015.04,3657.63 ccw(c4986.61,3686.06) C40.1@5026.81,3686.06 ; 5015.04,4132.63 ccw(c4986.61,4161.06) C37.1@5026.81,4161.06 ; C34.1@5022.03,3404.63 cw(c5035,3391.66) C34.1@5035,3410 ; C40.1@5022.6,3665.2 cw(c5047.4,3640.4) C40.1@5047.4,3675.47 ; C37.1@5022.6,4140.2 cw(c5047.4,4115.4) C37.1@5047.4,4150.47 ; C37.1@5034.77,4152.36 ccw(c5022.13,4165) C37.1@5040,4165 ; C40.1@5037.03,3679.63 cw(c5050,3666.66) C40.1@5050,3685 ; C37.1@5047.4,4165 5002.4,4120 4935,4120 4909.88,4145.12 ; C36.1@5262.6,3775.47 cw(c5262.6,3716.26) 5304.47,3758.13 ; C36.1@5262.6,3785.47 cw(c5262.6,3750.4) C36.1@5287.4,3775.2 ; C36.1@5262.6,3800 5317.6,3745 5365,3745 5389.25,3769.25 IS61LV25616.12@5440.51,3769.25 ; C36.1@5270,3800 ccw(c5287.87,3800) C36.1@5275.23,3787.36 ; C36.1@5283.19,3796.06 ccw(c5323.39,3796.06) 5294.96,3767.63 ; IS61LV25616.12@5418.1,3766.52 ccw(c5411.51,3759.94) 5411.51,3769.25 ccw(c5411.51,3778.57) IS61LV25616.12@5418.1,3771.98 ; IS61LV25616.34@5879.49,3800.75 5928.35,3800.75 C43.1@5980,3852.4 ; IS61LV25616.34@5901.9,3798.02 cw(c5908.49,3791.43) 5908.49,3800.75 cw(c5908.49,3810.06) IS61LV25616.34@5901.9,3803.48 ; 5938.13,3810.53 ccw(c5896.26,3852.4) C43.1@5955.47,3852.4 ; 5947.63,3820.04 cw(c5976.06,3791.61) C43.1@5976.06,3831.81 ; C43.1@5955.2,3827.6 ccw(c5930.4,3852.4) C43.1@5965.47,3852.4
  other v1: 5330,2940 5730,3165 4105,3225 4590,3225 4355,3230 5510,3245 2065,3280 2865,3300 5035,3415 3895,3475 4495,3515 2980,3520 3570,3605 4510,3610 4415,3655 5050,3690 4660,3695 5645,3745 5265,3800 5745,3815 4600,3855 3650,3885 3795,3885 4350,3915 5020,3920 5720,3965 4410,4160 5045,4165 5645,4205 6200,4245 4950,4270 5620,4325 4330,4435 4500,4440 4065,4450 3470,4475 4865,4615 5255,4765
  other v2: 4330.71,2047.24 8070.87,2125.98 2795.28,3425.2 1889.76,4763.78
IN+: 510K.2 OPA2376.3 | length 880.9
  Top Layer w20: 510K.2@2026.38,3654.96 ccw(c1999.76,3681.58) 2037.4,3681.58 ccw(c2075.04,3681.58) 510K.2@2048.43,3654.96 ; 510K.2@2026.38,3755.04 cw(c1999.76,3728.42) 2037.4,3728.42 cw(c2075.04,3728.42) 510K.2@2048.43,3755.04 ; 510K.2@2034.28,3777.05 cw(c2094.51,3716.83) 2094.51,3802 ; 510K.2@2037.4,3620.47 cw(c2037.4,3573.33) 2070.74,3606.66 ; 510K.2@2037.89,3789.52 ccw(c2039.22,3832.17) 2069.4,3802 ; 510K.2@2048.43,3762.91 cw(c2142.79,3668.55) OPA2376.3@2142.79,3802 ; 510K.2@2052.99,3636.06 ccw(c2081.13,3636.06) 510K.2@2061.23,3616.17 ; 510K.2@2052.99,3773.94 cw(c2081.13,3773.94) 510K.2@2061.23,3793.83 ; 2121.35,3597.4 cw(c2121.35,3542.69) 510K.2@2160.04,3581.38 ; 510K.2@2145.5,3597.4 ccw(c2145.5,3617.97) 510K.2@2160.04,3603.43 ; 510K.2@2155,3597.4 2080,3597.4 510K.2@2037.4,3640 510K.2@2037.4,3770 2069.4,3802 ; OPA2376.3@2174.64,3802 2069.4,3802
LCD_A0: FFC-1.0-24.18 STM32F103ZET6.4 | length 3680.7
  Top Layer w10: STM32F103ZET6.4@3997.68,4125.43 3635.43,4125.43 3375,3865 3375,3175 3570,2980 3765,2980 4240,2505 4945,2505 5096.69,2656.69 FFC-1.0-24.18@5096.69,2828.98 ; FFC-1.0-24.18@5091.88,2810.38 cw(c5080.25,2798.75) 5096.69,2798.75 cw(c5113.14,2798.75) FFC-1.0-24.18@5101.51,2810.38
LCD_A1: FFC-1.0-24.17 STM32F103ZET6.5 | length 3557
  Top Layer w10: 3440,3895 3445,3900 ; 3455,3910 3445,3900 ; STM32F103ZET6.5@3997.68,4105.75 3650.75,4105.75 3445,3900 ; FFC-1.0-24.17@5052.51,2810.38 cw(c5040.88,2798.75) 5057.32,2798.75 cw(c5073.77,2798.75) FFC-1.0-24.17@5062.14,2810.38 ; FFC-1.0-24.17@5057.32,2828.98 5057.32,2682.32 4905,2530 4250,2530 3775,3005 3580,3005 3400,3185 3400,3855 3445,3900
LCD_D0: FFC-1.0-24.16 STM32F103ZET6.26 | length 2515
  Top Layer w10: STM32F103ZET6.26@3997.68,3692.36 3827.36,3692.36 3755,3620 3755,3060 4260,2555 4865,2555 5017.95,2707.95 FFC-1.0-24.16@5017.95,2828.98 ; FFC-1.0-24.16@5013.14,2810.38 cw(c5001.51,2798.75) 5017.95,2798.75 cw(c5034.4,2798.75) FFC-1.0-24.16@5022.77,2810.38
LCD_D1: FFC-1.0-24.15 STM32F103ZET6.27 | length 2378.8
  Top Layer w10: STM32F103ZET6.27@3997.68,3672.68 3842.68,3672.68 3780,3610 3780,3070 4270,2580 4840,2580 4978.58,2718.58 FFC-1.0-24.15@4978.58,2828.98 ; FFC-1.0-24.15@4973.77,2810.38 cw(c4962.14,2798.75) 4978.58,2798.75 cw(c4995.03,2798.75) FFC-1.0-24.15@4983.4,2810.38
LCD_D2: FFC-1.0-24.14 STM32F103ZET6.28 | length 2242.6
  Top Layer w10: STM32F103ZET6.28@3997.68,3652.99 3857.99,3652.99 3805,3600 3805,3080 4280,2605 4815,2605 4939.21,2729.21 FFC-1.0-24.14@4939.21,2828.98 ; FFC-1.0-24.14@4934.4,2810.38 cw(c4922.77,2798.75) 4939.21,2798.75 cw(c4955.66,2798.75) FFC-1.0-24.14@4944.03,2810.38
LCD_D3: FFC-1.0-24.13 STM32F103ZET6.29 | length 2103.5
  Top Layer w10: STM32F103ZET6.29@3997.68,3633.31 3873.31,3633.31 3830,3590 3830,3090 4290,2630 4785,2630 4899.84,2744.84 FFC-1.0-24.13@4899.84,2828.98 ; FFC-1.0-24.13@4895.03,2810.38 cw(c4883.4,2798.75) 4899.84,2798.75 cw(c4916.29,2798.75) FFC-1.0-24.13@4904.66,2810.38
LCD_D4: FFC-1.0-24.12 STM32F103ZET6.44 | length 1492.4
  Top Layer w10: STM32F103ZET6.44@4208.31,3422.68 4208.31,2746.69 4300,2655 4735,2655 4860.47,2780.47 FFC-1.0-24.12@4860.47,2828.98 ; FFC-1.0-24.12@4855.66,2810.38 cw(c4844.03,2798.75) 4860.47,2798.75 cw(c4876.92,2798.75) FFC-1.0-24.12@4865.29,2810.38
LCD_D5: FFC-1.0-24.11 STM32F103ZET6.45 | length 1076.1
  Top Layer w10: STM32F103ZET6.45@4227.99,3422.68 4227.99,3122.01 4420,2930 4780,2930 4821.1,2888.9 FFC-1.0-24.11@4821.1,2828.98 ; FFC-1.0-24.11@4816.29,2847.57 ccw(c4804.66,2859.2) 4821.1,2859.2 ccw(c4837.55,2859.2) FFC-1.0-24.11@4825.92,2847.57
LCD_D6: FFC-1.0-24.10 STM32F103ZET6.96 | length 1985.8
  Top Layer w10: v1(4270,3600) 4618.27,3948.27 STM32F103ZET6.96@4832.32,3948.27 ; v1@4270,3605 ccw(c4270,3617.07) 4278.54,3608.54 ccw(c4287.07,3600) v1@4275,3600 ; v1@4776.46,2871.46 cw(c4763.75,2858.75) 4781.73,2858.75 ; FFC-1.0-24.10@4776.92,2847.57 ccw(c4765.29,2859.2) 4781.73,2859.2 ccw(c4798.18,2859.2) FFC-1.0-24.10@4786.55,2847.57 ; FFC-1.0-24.10@4781.73,2828.98 v1@4781.73,2875
  Bottom Layer w10: v1@4265,3600 cw(c4252.93,3600) 4261.46,3591.46 cw(c4270,3582.93) v1@4270,3595 ; v1(4270,3600) 4230,3560 4230,3175 4335,3070 4620,3070 4780,2910 v1(4780,2875) ; v1@4776.46,2878.54 ccw(c4767.93,2887.07) 4780,2887.07 ccw(c4792.07,2887.07) v1@4783.54,2878.54
LCD_D7: FFC-1.0-24.9 STM32F103ZET6.97 | length 2060
  Top Layer w10: v1(4255,3675) 4547.95,3967.95 STM32F103ZET6.97@4832.32,3967.95 ; v1@4255,3680 ccw(c4255,3692.07) 4263.54,3683.54 ccw(c4272.07,3675) v1@4260,3675 ; v1@4736.46,2871.46 cw(c4727.93,2862.93) 4740,2862.93 cw(c4752.07,2862.93) v1@4743.54,2871.46 ; 4740,2864.9 ccw(c4764.51,2864.9) FFC-1.0-24.9@4747.18,2847.57 ; v1(4740,2875) 4740,2831.34 FFC-1.0-24.9@4742.36,2828.98
  Bottom Layer w10: v1@4250,3675 cw(c4237.93,3675) 4246.46,3666.46 cw(c4255,3657.93) v1@4255,3670 ; v1(4255,3675) 4200,3620 4200,3140 4305,3035 4600,3035 4740,2895 v1(4740,2875) ; v1@4736.46,2878.54 ccw(c4727.93,2887.07) 4740,2887.07 ccw(c4752.07,2887.07) v1@4743.54,2878.54
LCD_RD: FFC-1.0-24.21 STM32F103ZET6.2 | length 3981.1
  Top Layer w10: STM32F103ZET6.2@3997.68,4164.8 3604.8,4164.8 3325,3885 3325,3155 3550,2930 3740,2930 4215,2455 5015,2455 5214.8,2654.8 FFC-1.0-24.21@5214.8,2828.98 ; FFC-1.0-24.21@5209.99,2810.38 cw(c5198.36,2798.75) 5214.8,2798.75 cw(c5231.25,2798.75) FFC-1.0-24.21@5219.62,2810.38
LCD_WR: FFC-1.0-24.20 STM32F103ZET6.3 | length 3839.1
  Top Layer w10: STM32F103ZET6.3@3997.68,4145.12 3620.12,4145.12 3350,3875 3350,3165 3560,2955 3755,2955 4230,2480 4980,2480 5175.43,2675.43 FFC-1.0-24.20@5175.43,2828.98 ; FFC-1.0-24.20@5170.62,2810.38 cw(c5158.99,2798.75) 5175.43,2798.75 cw(c5191.88,2798.75) FFC-1.0-24.20@5180.25,2810.38
M1_D: M1.1 STM32F103ZET6.35 | length 3767.6
  Top Layer w10: STM32F103ZET6.35@3997.68,3515.2 4045.2,3515.2 4155,3625 4155,4050 v1(4100,4105) v1@4097.5,4107.5 ; v1@4100,4100 cw(c4100,4087.93) 4108.54,4096.46 cw(c4117.07,4105) v1@4105,4105
  Bottom Layer w10: M1.1@2175,5230 cw(c2175,5097.22) 2268.89,5191.11 cw(c2362.78,5285) M1.1@2230,5285 ; M1.1@2175,5240 cw(c2175,5131.36) 2251.82,5208.18 cw(c2328.64,5285) M1.1@2220,5285 ; M1.1@2175,5250 cw(c2175,5165.5) 2234.75,5225.25 cw(c2294.5,5285) M1.1@2210,5285 ; M1.1@2175,5260 cw(c2175,5199.64) 2217.68,5242.32 cw(c2260.36,5285) M1.1@2200,5285 ; M1.1@2175,5285 2400,5060 3145,5060 v1(4100,4105) ; v1@4095,4105 ccw(c4082.93,4105) 4091.46,4113.54 ccw(c4100,4122.07) v1@4100,4110
M1_P: M1.2 STM32F103ZET6.34 | length 3886.8
  Top Layer w10: STM32F103ZET6.34@3997.68,3534.88 3997.8,3535 4032.48,3535 4130,3632.52 4130,4025 v1(4070,4085) ; v1@4070,4080 cw(c4070,4067.93) 4078.54,4076.46 cw(c4087.07,4085) v1@4075,4085
  Bottom Layer w10: M1.2@1975,5230 cw(c1975,5097.22) 2068.89,5191.11 cw(c2162.78,5285) M1.2@2030,5285 ; M1.2@1975,5240 cw(c1975,5131.36) 2051.82,5208.18 cw(c2128.64,5285) M1.2@2020,5285 ; M1.2@1975,5250 cw(c1975,5165.5) 2034.75,5225.25 cw(c2094.5,5285) M1.2@2010,5285 ; M1.2@1975,5260 cw(c1975,5199.64) 2017.68,5242.32 cw(c2060.36,5285) M1.2@2000,5285 ; M1.2@1975,5285 2270,4990 3165,4990 v1(4070,4085) ; v1@4065,4085 ccw(c4052.93,4085) 4061.46,4093.54 ccw(c4070,4102.07) v1@4070,4090
M2_D: M2.1 STM32F103ZET6.37 | length 2972.8
  Top Layer w10: STM32F103ZET6.37@4070.51,3422.68 4070.51,3470.51 4205,3605 4205,4100 v1(4150,4155) ; v1@4150,4150 cw(c4150,4137.93) 4158.54,4146.46 cw(c4167.07,4155) v1@4155,4155
  Bottom Layer w10: M2.1@3176.11,5246.11 cw(c3082.22,5152.22) 3215,5152.22 cw(c3347.78,5152.22) M2.1@3253.89,5246.11 ; M2.1@3183.18,5253.18 cw(c3106.36,5176.36) 3215,5176.36 cw(c3323.64,5176.36) M2.1@3246.82,5253.18 ; M2.1@3190.25,5260.25 cw(c3130.5,5200.5) 3215,5200.5 cw(c3299.5,5200.5) M2.1@3239.75,5260.25 ; M2.1@3197.32,5267.32 cw(c3154.64,5224.64) 3215,5224.64 cw(c3275.36,5224.64) M2.1@3232.68,5267.32 ; M2.1@3215,5285 3215,5090 v1(4150,4155) ; v1@4145,4155 ccw(c4132.93,4155) 4141.46,4163.54 ccw(c4150,4172.07) v1@4150,4160
M2_P: M2.2 STM32F103ZET6.36 | length 3370.4
  Top Layer w10: STM32F103ZET6.36@3997.68,3495.51 4060.51,3495.51 4180,3615 4180,4075 v1(4125,4130) ; v1@4125,4125 cw(c4125,4112.93) 4133.54,4121.46 cw(c4142.07,4130) v1@4130,4130
  Bottom Layer w10: M2.2@3010,5285 ccw(c3106.57,5285) 3038.28,5216.72 ; M2.2@3015,5230 cw(c3015,5205.86) 3032.07,5222.93 ; M2.2@3015,5285 3015,5240 v1(4125,4130) ; M2.2@3020,5285 ccw(c3140.71,5285) 3055.36,5199.64 ; M2.2@3030,5285 ccw(c3174.85,5285) 3072.43,5182.57 ; M2.2@3040,5285 ccw(c3208.99,5285) 3089.5,5165.5 ; M2.2@3050,5285 ccw(c3243.14,5285) 3106.57,5148.43 ; M2.2@3060,5285 ccw(c3277.28,5285) 3123.64,5131.36 ; M2.2@3070,5285 ccw(c3311.42,5285) 3140.71,5114.29 ; v1@4120,4130 ccw(c4107.93,4130) 4116.46,4138.54 ccw(c4125,4147.07) v1@4125,4135
M3_D: M3.1 STM32F103ZET6.136 | length 2582.6
  Top Layer w10: v1@4194.84,4165 ccw(c4195.56,4187.75) 4211.66,4171.66 ; v1(4195,4170) 4210,4170 4227.99,4187.99 ; v1@4195.16,4175 ccw(c4196.57,4219.41) 4227.99,4187.99 ; v1@4198.54,4166.46 cw(c4207.07,4157.93) 4207.07,4170 cw(c4207.07,4182.07) v1@4198.54,4173.54 ; STM32F103ZET6.136@4227.99,4257.32 4227.99,4187.99
  Bottom Layer w10: v1@4191.46,4166.46 ccw(c4182.93,4157.93) 4182.93,4170 ccw(c4182.93,4182.07) v1@4191.46,4173.54 ; v1(4195,4170) 4170,4170 3625,4715 3625,4915 3955,5245 3955,5325 4005,5375 4165,5375 ; M3.1@4200.03,5286.67 ccw(c4080.33,5290.32) 4165.01,5374.99 ; M3.1@4210.02,5286.37 ccw(c4112.09,5289.35) 4181.37,5358.63 ccw(c4250.65,5427.91) M3.1@4253.63,5329.98 ; M3.1@4220.02,5286.06 ccw(c4143.84,5288.38) 4197.73,5342.27 ccw(c4251.62,5396.16) M3.1@4253.94,5319.98 ; M3.1@4253.33,5339.97 cw(c4249.68,5459.67) 4165.01,5374.99 ; M3.1@4255,5285 4165,5375
M3_P: M3.2 STM32F103ZET6.137 | length 2238.7
  Top Layer w10: v1@4201.46,4203.54 ccw(c4184.94,4220.06) 4208.31,4220.06 ; v1(4205,4200) 4208.31,4203.31 STM32F103ZET6.137@4208.31,4257.32
  Bottom Layer w10: M3.2@4000,5285 cw(c3867.22,5285) 3961.11,5191.11 cw(c4055,5097.22) M3.2@4055,5230 ; M3.2@4010,5285 cw(c3901.36,5285) 3978.18,5208.18 cw(c4055,5131.36) M3.2@4055,5240 ; M3.2@4020,5285 cw(c3935.5,5285) 3995.25,5225.25 cw(c4055,5165.5) M3.2@4055,5250 ; M3.2@4030,5285 cw(c3969.64,5285) 4012.32,5242.32 cw(c4055,5199.64) M3.2@4055,5260 ; M3.2@4055,5285 3665,4895 3665,4725 4190,4200 v1(4205,4200) ; 4170.86,4219.14 ccw(c4205,4253.28) v1@4205,4205 ; 4187.93,4202.07 ccw(c4205,4219.14) v1@4205,4195 ; v1@4201.46,4196.46 ccw(c4192.93,4187.93) 4192.93,4200 ccw(c4192.93,4212.07) v1@4201.46,4203.54
MISO: STM32F103ZET6.9 TM7707.13 | length 1430
  Top Layer w10: TM7707.13@2879.81,3904.14 ccw(c2901.43,3904.14) 2886.14,3888.86 ; TM7707.13@2883,3932.69 2883,3892 ; TM7707.13@2889.81,3904.14 ccw(c2935.57,3904.14) 2903.21,3871.79 ; v1@3091.46,3816.46 ccw(c3082.93,3807.93) 3082.93,3820 ccw(c3082.93,3832.07) v1@3091.46,3823.54 ; v1(3095,3820) 2955,3820 2883,3892 ; v1(3805,3985) 3847.01,4027.01 STM32F103ZET6.9@3997.68,4027.01 ; v1@3805,3990 ccw(c3805,4002.07) 3813.54,3993.54 ccw(c3822.07,3985) v1@3810,3985 ; 2883,3892 ccw(c2875.58,3892) 2879.45,3898.33 cw(c2875.58,3892) 2883,3892 ; 2883,3892 cw(c2890.42,3892) 2886.55,3898.33 ccw(c2890.42,3892) 2883,3892
  Bottom Layer w10: v1(3095,3820) 3640,3820 v1(3805,3985) ; v1@3098.54,3816.46 cw(c3107.07,3807.93) 3107.07,3820 cw(c3107.07,3832.07) v1@3098.54,3823.54 ; v1@3800,3985 cw(c3787.93,3985) 3796.46,3976.46 cw(c3805,3967.93) v1@3805,3980
MOSI: STM32F103ZET6.8 TM7707.14 | length 1339.1
  Top Layer w10: TM7707.14@2929.84,3904.57 ccw(c2946.59,3902.31) 2934.64,3890.36 ; TM7707.14@2933,3932.69 2933,3892 ; TM7707.14@2939.75,3903.23 ccw(c2971.78,3898.93) 2948.93,3876.07 ; v1@3091.46,3866.46 ccw(c3082.93,3857.93) 3082.93,3870 ccw(c3082.93,3882.07) v1@3091.46,3873.54 ; v1(3095,3870) 2955,3870 2933,3892 ; v1(3700,3990) 3756.69,4046.69 STM32F103ZET6.8@3997.68,4046.69 ; v1@3700,3995 ccw(c3700,4007.07) 3708.54,3998.54 ccw(c3717.07,3990) v1@3705,3990 ; 2933,3892 ccw(c2925.58,3892) 2929.45,3898.33 cw(c2925.58,3892) 2933,3892 ; 2933,3892 cw(c2940.42,3892) 2936.55,3898.33 ccw(c2940.42,3892) 2933,3892
  Bottom Layer w10: v1(3095,3870) 3580,3870 v1(3700,3990) ; v1@3098.54,3866.46 cw(c3107.07,3857.93) 3107.07,3870 cw(c3107.07,3882.07) v1@3098.54,3873.54 ; v1@3695,3990 cw(c3682.93,3990) 3691.46,3981.46 cw(c3700,3972.93) v1@3700,3985
NetC1_1: 1K.2@3522.6,2780 4.3K.1 101.1 LM2596-ADJ.4 | length 686.8
  Top Layer w30: 101.1@3192.4,2780 3257.4,2845 3385,2845 3407.4,2822.6 4.3K.1@3407.4,2780 3460,2780 ; 101.1@3192.4,2794.53 ccw(c3192.4,2829.6) 101.1@3217.2,2804.8 ; 3413.97,2816.03 cw(c3382.91,2784.97) 4.3K.1@3426.79,2783.12 ; LM2596-ADJ.4@3458.07,2566.85 3458.07,2778.07 3460,2780 ; 1K.2@3522.6,2780 3460,2780
NetC1_2: 4.3K.2 33uH.2 101.2 220uF.1 "Ferrite bead.1" "POWER SWITCH.1" "POWER SWITCH.2" "POWER SWITCH.5" "POWER SWITCH.6" | length 5587
  Top Layer w30: 2347.4,2505 2595,2505 2875,2785 2875,2985 ; 220uF.1@2480,2310 2715,2545 ; 220uF.1@2480,2313.74 ccw(c2480,2322.77) 220uF.1@2486.38,2316.38 ; 220uF.1@2480,2343.74 ccw(c2480,2425.2) 2537.6,2367.6 ; 220uF.1@2480,2373.74 ccw(c2480,2527.62) 2588.81,2418.81 ; 33uH.2@2847.39,2487.81 ccw(c2715.01,2363.18) 2715.01,2545 ; 33uH.2@2847.39,2602.19 cw(c2715.01,2726.82) 2715.01,2545 ; 2853.58,2785 cw(c2801.88,2785) 2838.44,2748.44 cw(c2875,2711.88) 2875,2763.58 ; 2859.86,2800.14 ccw(c2823.29,2836.71) 2875,2836.71 ccw(c2926.71,2836.71) 2890.14,2800.14 ; 2859.86,2969.86 cw(c2823.29,2933.29) 2875,2933.29 cw(c2926.71,2933.29) 2890.14,2969.86 ; 33uH.2@2869.23,2508.38 ccw(c2784.46,2428.57) 2784.46,2545 ccw(c2784.46,2661.43) 33uH.2@2869.23,2581.62 ; 2959.86,2800.14 ccw(c2923.29,2836.71) 2975,2836.71 ccw(c3026.71,2836.71) 2990.14,2800.14 ccw(c3026.71,2836.71) 3026.71,2785 ccw(c3026.71,2733.29) 2990.14,2769.86 ; 2959.86,2969.86 cw(c2923.29,2933.29) 2975,2933.29 cw(c3026.71,2933.29) 2990.14,2969.86 ; 2975,2985 2975,2785 3112.6,2785 101.2@3117.6,2780 3117.6,2715.1 ; 33uH.2@2986.87,2508.43 ccw(c2986.87,2687.45) 3113.46,2560.86 ; 33uH.2@2986.87,2538.43 ccw(c2986.87,2789.87) 3164.67,2612.07 ; 33uH.2@2986.87,2568.43 ccw(c2986.87,2892.3) 3215.88,2663.29 ; 33uH.2@2986.87,2598.43 ccw(c2986.87,2994.73) 3267.1,2714.5 ; 33uH.2@3009.92,2549.16 cw(c3104.28,2566.18) 33uH.2@3036.48,2633.98 ; 33uH.2@3039.45,2554.49 cw(c3172.99,2578.58) 3077.04,2674.54 ; 3062.08,2659.58 cw(c2986.87,2734.78) 2986.87,2628.43 ccw(c2986.87,3097.15) 4.3K.2@3318.31,2765.71 ; 33uH.2@3067.06,2521.99 cw(c3097.6,2513.23) 3097.6,2545 ; 33uH.2@3067.06,2568.01 ccw(c3097.6,2576.77) 3097.6,2545 ; 33uH.2@3068.97,2559.81 cw(c3241.71,2590.98) 3117.59,2715.09 ; 3089.46,2785 cw(c3089.46,2755.8) 101.2@3110.11,2776.45 ; 4.3K.2@3307.8,2755.2 cw(c3332.6,2730.4) 4.3K.2@3332.6,2765.47 ; 4.3K.2@3332.6,2780 3097.6,2545 ; 2715,2545 33uH.2@2947.5,2545 ; 33uH.2@2947.5,2545 3117.6,2715.1 ; 33uH.2@2947.5,2545 3097.6,2545
NetC8_1: C8.1 MAX232.1 | length 311
  Top Layer w20: C8.1@7217.91,5046.57 cw(c7138.03,4966.69) MAX232.1@7251,4966.69 ; C8.1@7225,5057.6 7251,5031.6 MAX232.1@7251,4940.36 ; C8.1@7228.94,5042.01 cw(c7228.94,5013.87) C8.1@7248.83,5033.77 ; C8.1@7232.05,5060.72 cw(c7186.32,5014.98) 7251,5014.98 ; C8.1@7243.92,5053.3 ccw(c7263.23,5047.77) C8.1@7249.03,5033.57
NetC8_2: C8.2 MAX232.3 | length 284.4
  Top Layer w20: MAX232.3@7151,4940.36 7151,5006 7170,5025 7170,5081.76 7220.64,5132.4 C8.2@7225,5132.4 ; 7193.73,5105.49 cw(c7221.06,5078.16) C8.2@7221.06,5116.81 ; 7194.74,5106.5 ccw(c7168.84,5132.4) C8.2@7205.47,5132.4
NetC9_2: C9.2 MAX232.2 | length 307.1
  Top Layer w20: MAX232.2@7201,4940.36 7201,4899 7262.6,4837.4 C9.2@7360,4837.4 ; MAX232.2@7202.81,4908.87 ccw(c7231,4908.87) 7211.07,4888.93 ; C9.2@7345.04,4826.38 ccw(c7318.42,4799.76) 7318.42,4837.4 ccw(c7318.42,4875.04) C9.2@7345.04,4848.43
NetC10_1: C10.1 MAX232.4 | length 180.1
  Top Layer w20: C10.1@7095.04,5046.57 cw(c7080.65,5032.18) C10.1@7101,5032.18 ; MAX232.4@7101,4940.36 7101,5048.6 C10.1@7110,5057.6 ; 7101,5007.74 cw(c7155.93,5007.74) C10.1@7117.09,5046.57
NetC10_2: C10.2 MAX232.5 | length 269.1
  Top Layer w20: MAX232.5@7051,4940.36 7051,5101 7082.4,5132.4 C10.2@7110,5132.4 ; 7073.24,5123.24 cw(c7106,5090.48) C10.2@7106.07,5136.81